# Allegro board fpga_ccd_3.brd
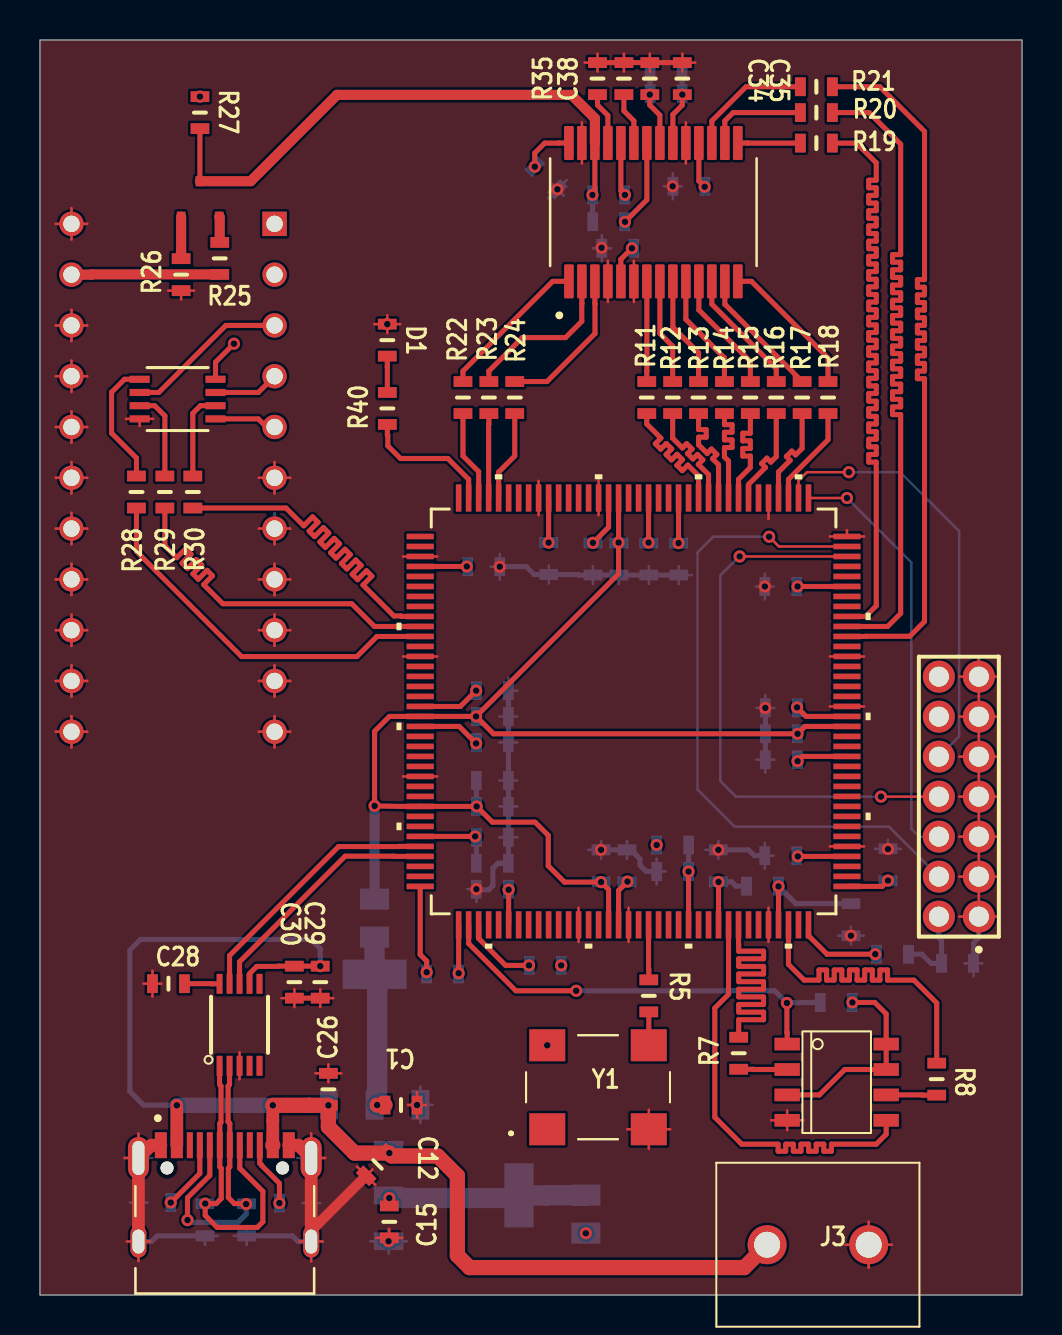
[diagram p0: board, top side]
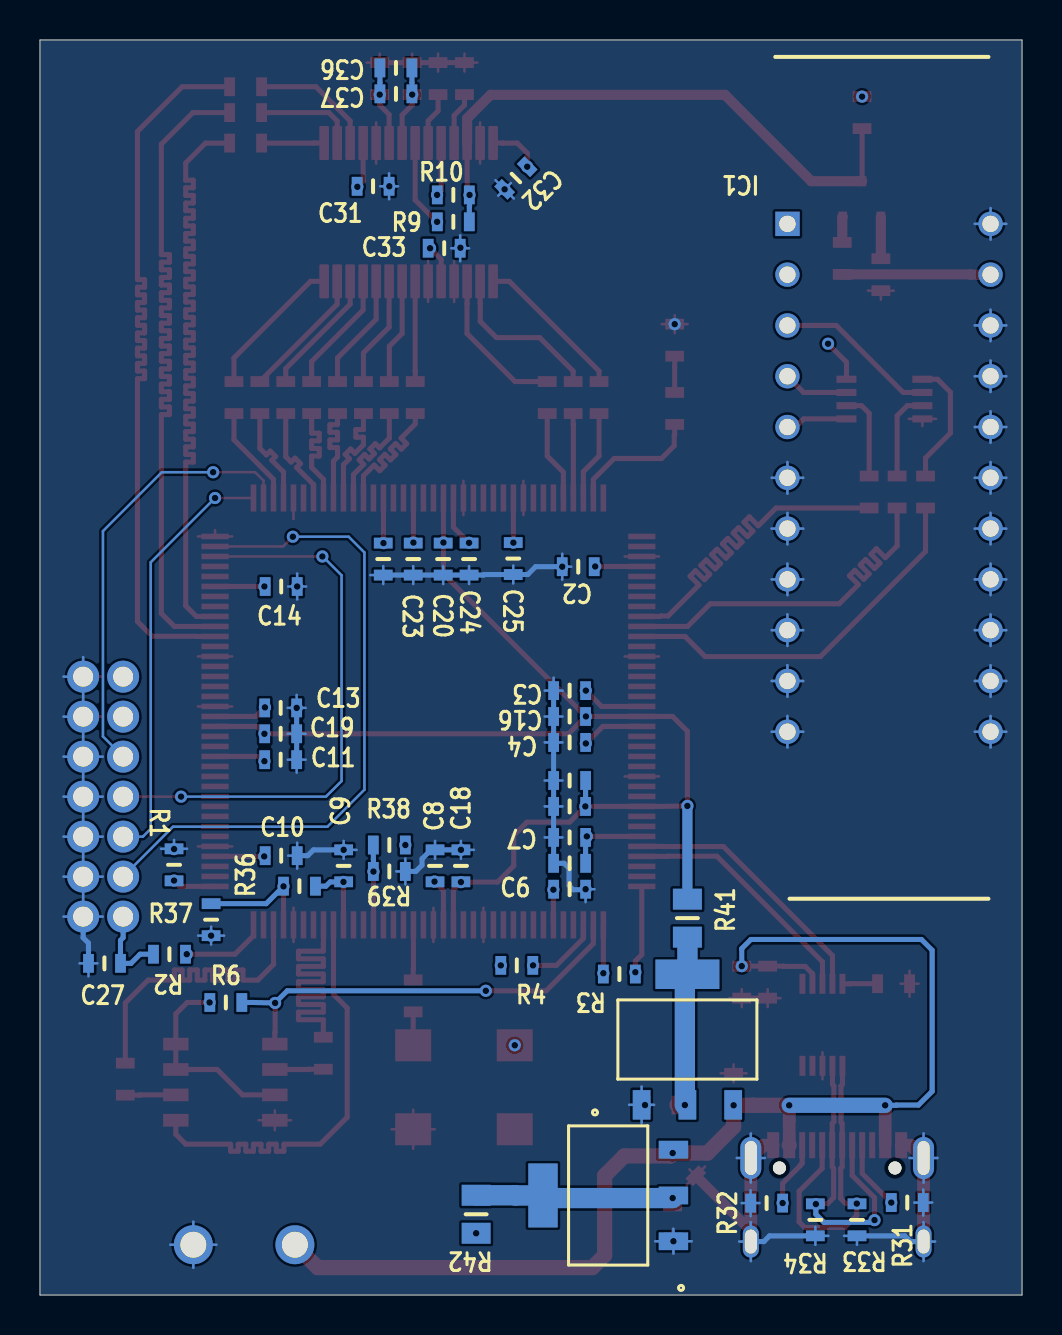
[diagram p1: board, bottom side, seen from below]

Outline 49.12 x 62.76 mm; copper layers: TOP, GND, POWER, BOTTOM. Coordinates in mm from the lower left corner of the outline.
Outline path: 0,62.76 0,0 49.12,0 49.12,62.76 0,62.76

## Design rules (mm)
constraint set DEFAULT: min track width 0.127
net group +1.2V: nets +1.2V N30787
net group CLK_50M: nets CLK_50M N10342
net group N39901: nets N39901 N39920
net group N45186: nets N45080 N45186
net group N103582: nets N103518 N103582
net group USB_D: nets USB_D+ USB_D-
net group CCD_OS: nets CCD_OS N41358 N41362

## Placement (name value [footprint] x y rotation side)
C1  10uF  [0603]  18.06 9.5 180 top
C2  10uF  [0603]  22.2 36.42 0 bottom
C3  100nF  [0603]  22.63 30.23 0 bottom
C4  100nF  [0603]  22.63 27.64 0 bottom
C5  100nF  [0603]  22.63 21.59 0 bottom
C6  100nF  [0603]  22.63 20.29 180 bottom
C7  100nF  [0603]  22.63 22.89 0 bottom
C8  100nF  [0603]  29.36 21.46 90 bottom
C9  100nF  [0603]  33.93 21.46 90 bottom
C10  100nF  [0603]  37.06 21.97 180 bottom
C11  100nF  [0603]  37.08 26.77 180 bottom
C12  10uF  [0603]  16.88 6.53 225 top
C13  100nF  [0603]  37.08 29.36 180 bottom
C14  100nF  [0603]  37.06 35.43 180 bottom
C15  10uF  [0603]  17.48 3.66 90 top
C16  10uF  [0603]  22.63 28.93 0 bottom
C17  100nF  [0603]  22.63 24.43 0 bottom
C18  100nF  [0603]  28.07 21.46 90 bottom
C19  100nF  [0603]  37.08 28.07 180 bottom
C20  100nF  [0603]  28.96 36.8 270 bottom
C21  100nF  [0603]  22.63 25.73 0 bottom
C22  100nF  [0603]  31.95 36.8 270 bottom
C23  100nF  [0603]  30.45 36.8 270 bottom
C24  100nF  [0603]  27.66 36.8 270 bottom
C25  100nF  [0603]  25.45 36.83 270 bottom
C26  10uF  [0603]  14.43 10.29 90 top
C27  100nF  [0603]  45.9 16.59 180 bottom
C28  100nF  [0603]  6.43 15.57 0 top
C29  10uF  [0603]  14.02 15.65 270 top
C30  10uF  [0603]  12.73 15.65 270 top
C31  100nF  [0603]  32.46 55.45 180 bottom
C32  100nF  [0603]  25.32 55.86 315 bottom
C33  100nF  [0603]  28.91 52.35 180 bottom
C34  100nF  [0603]  30.51 60.83 270 top
C35  100nF  [0603]  32.13 60.83 270 top
C36  100nF  [0603]  31.32 61.37 0 bottom
C37  10uF  [0603]  31.32 60.07 0 bottom
C38  100nF  [0603]  29.21 60.83 270 top
D1  LED  [0603]  17.37 47.75 270 top
IC1  TCD1304DG_8Z_AW_  [DIP1016W62P254L4160H372Q22N]  11.73 53.57 180 bottom
J1  CONN SOCKET 7x2  [CONN_BULK_HEADER_2X7_2_2]  46.96 18.92 90 top
J2  CQ-USB-C16PSMT01  [SHENZHEN-CHUANGQIN-TECHNOLO]  9.25 7.49 0 top
J3  TB006-508-02BE  [TB00650802BE]  36.37 2.51 0 top
NOREF  -  []  0 0 90 top
NOREF#2  -  []  0 0 0 top
Q1  2SA1015  [SOT23]  8 54.81 90 top
R1  4.7K  [0603]  42.42 21.51 270 bottom
R2  4.7K  [0603]  42.65 17.04 0 bottom
R3  4.7K  [0603]  20.14 16.05 0 bottom
R4  4.7K  [0603]  25.27 16.48 180 bottom
R5  33  [0603]  30.45 14.96 270 top
R6  4.7K  [0603]  39.83 14.63 180 bottom
R7  33  [0603]  34.95 12.09 90 top
R8  33  [0603]  44.86 10.79 270 top
R9  NC  [0603]  28.45 53.67 180 bottom
R10  NC  [0603]  28.45 55.02 180 bottom
R11  33R  [0603]  30.35 44.88 90 top
R12  33R  [0603]  31.65 44.88 90 top
R13  33R  [0603]  32.94 44.88 90 top
R14  33R  [0603]  34.24 44.88 90 top
R15  33R  [0603]  35.53 44.88 90 top
R16  33R  [0603]  36.83 44.88 90 top
R17  33R  [0603]  38.13 44.88 90 top
R18  33R  [0603]  39.42 44.88 90 top
R19  33R  [0603]  38.84 57.61 0 top
R20  33R  [0603]  38.84 59.13 0 top
R21  33R  [0603]  38.84 60.43 0 top
R22  33R  [0603]  21.16 44.88 90 top
R23  33R  [0603]  22.45 44.88 90 top
R24  33R  [0603]  23.75 44.88 90 top
R25  150R  [0603]  8.99 51.84 90 top
R26  150R  [0603]  7.06 51.03 90 top
R27  150R  [0603]  8 59.13 270 top
R28  33R  [0603]  4.83 40.16 90 top
R29  33R  [0603]  6.25 40.16 90 top
R30  33R  [0603]  7.65 40.16 90 top
R31  5.1K  [0603]  5.74 4.62 0 bottom
R32  5.1K  [0603]  12.78 4.6 0 bottom
R33  45R  [0603]  8.25 3.76 270 bottom
R34  45R  [0603]  10.34 3.76 270 bottom
R35  1K  [0603]  27.89 60.83 90 top
R36  0R  [0603]  36.14 20.45 180 bottom
R37  NC  [0603]  40.56 18.77 90 bottom
R38  NC  [0603]  31.65 22.5 180 bottom
R39  1K  [0603]  31.65 21.18 0 bottom
R40  1K  [0603]  17.38 44.34 90 top
R41  10R  [0805]  16.74 18.85 90 bottom
R42  10R  [0805]  27.31 4.04 270 bottom
U1  XC6SLX9-2TQG144C_A  [TQG144_XIL]  29.69 29.18 0 top
U2  AMS1117-1.2v  [SOT_AMS1117-2P5_AMS]  16.74 12.78 180 bottom
U3  AMS1117-3.3v  [SOT_AMS1117-2P5_AMS]  20.7 4.98 90 bottom
U4  M25P16-VMN6TPBA  [SOIC8]  39.85 10.64 0 top
U5  CH340E  [MSOP-10]  9.98 13.51 90 top
U6  HT82V38  [SSOP-28]  30.68 54.15 90 top
U7  TC7WH14FU  [SSOP-8]  6.88 44.81 0 top
Y1  50MHz  [SMD7050]  27.91 10.39 0 top

## Library data of the parts
C1-C38 = CAP NP
D1 = LED
IC1 = TCD1304DG_8Z,AW_
J1 = CONN SOCKET 7x2
J2 = USB-C 16pin
J3 = TB006-508-02BE
Q1 = 2N6520
R1-R5 R7 R8 R36-R39 = RESISTOR
R6 = Res 0603
R9-R35 R40-R42 = R
U1 = XC6SLX9-2TQG144C: User Part Number: PN; Tolerance: TOL
U2 U3 = AMS1117: User Part Number: PN; Tolerance: TOL
U4 = M25P16-VMN6TPBA: Tolerance: ***; User Part Number: ***
U5 = CH340E
U6 = HT82V38
U7 = TC7WH14FU: User Part Number: PN; Tolerance: TOL
Y1 = Oscillator 4p

## Footprints (pads in the part's own frame, mm; a bottom-side part is the same pattern mirrored in y, then rotated)
0603
  rect 0.54x0.94 smd: 1(-0.8,0) 2(0.8,0)
0805
  rect 1.05x1.45 smd: 1(-0.95,0) 2(0.95,0)
CONN_BULK_HEADER_2X7_2_2
  round 1.6 hole 1: 1(0,0) 2(0,2) 3(2,0) 4(2,2) 5(4,0) 6(4,2) 7(6,0) 8(6,2) 9(8,0) 10(8,2) 11(10,0) 12(10,2) 13(12,0) 14(12,2)
DIP1016W62P254L4160H372Q22N
  rect 1.22x1.22 hole 0.82: 1(0,0)
  round 1.22 hole 0.82: 2(0,-2.54) 3(0,-5.08) 4(0,-7.62) 5(0,-10.16) 6(0,-12.7) 7(0,-15.24) 8(0,-17.78) 9(0,-20.32) 10(0,-22.86) 11(0,-25.4) 12(10.16,-25.4) 13(10.16,-22.86) 14(10.16,-20.32) 15(10.16,-17.78) 16(10.16,-15.24) 17(10.16,-12.7) 18(10.16,-10.16) 19(10.16,-7.62) 20(10.16,-5.08) 21(10.16,-2.54) 22(10.16,0)
MSOP-10
  rect 1x0.3 smd: 1(-2.05,1) 2(-2.05,0.5) 3(-2.05,0) 4(-2.05,-0.5) 5(-2.05,-1) 6(2.05,-1) 7(2.05,-0.5) 8(2.05,0) 9(2.05,0.5) 10(2.05,1)
SHENZHEN-CHUANGQIN-TECHNOLO
  round 0.65 hole 0.65 unplated: (-2.89,-1.14) (2.89,-1.14)
  rect 0.6x1.3 smd: A1_B12(-3.2,0) A4_B9(-2.4,0) B1_A12(3.2,0) B4_A9(2.4,0)
  rect 0.3x1.3 smd: A5(-1.25,0) A6(-0.25,0) A7(0.25,0) A8(1.25,0) B5(1.75,0) B6(0.75,0) B7(-0.75,0) B8(-1.75,0)
  oval 1.05x2.1 hole 0.6x1.7: S1(-4.32,-0.64) S2(4.32,-0.64)
  oval 0.8x1.6 hole 0.6x1.2: S3(-4.32,-4.82) S4(4.32,-4.82)
SMD7050
  rect 1.8x1.6 smd: 1(-2.54,-2.1) 2(2.54,-2.1) 3(2.54,2.1) 4(-2.54,2.1)
SOIC8
  rect 1.27x0.635 smd: 1(-2.477,1.905) 2(-2.477,0.635) 3(-2.477,-0.635) 4(-2.477,-1.905) 5(2.477,-1.905) 6(2.477,-0.635) 7(2.477,0.635) 8(2.477,1.905)
SOT23
  rect 0.508x0.432 smd: 1(-0.889,0.94) 2(-0.889,-0.965) 3(0.889,0)
SOT_AMS1117-2P5_AMS
  rect 0.889x1.473 smd: 1(-2.29,-3.264) 2(0,-3.264) 3(2.29,-3.264)
  rect 3.2x1.473 smd: 4(0,3.264)
SSOP-8
  rect 1.003x0.356 smd: 1(-1.899,0.991) 2(-1.899,0.33) 3(-1.899,-0.33) 4(-1.899,-0.991) 5(1.899,-0.991) 6(1.899,-0.33) 7(1.899,0.33) 8(1.899,0.991)
SSOP-28
  custom 1.7x0.48 smd: 1(-3.46,4.225) 2(-3.46,3.575) 3(-3.46,2.925) 4(-3.46,2.275) 5(-3.46,1.625) 6(-3.46,0.975) 7(-3.46,0.325) 8(-3.46,-0.325) 9(-3.46,-0.975) 10(-3.46,-1.625) 11(-3.46,-2.275) 12(-3.46,-2.925) 13(-3.46,-3.575) 14(-3.46,-4.225) 15(3.46,-4.225) 16(3.46,-3.575) 17(3.46,-2.925) 18(3.46,-2.275) 19(3.46,-1.625) 20(3.46,-0.975) 21(3.46,-0.325) 22(3.46,0.325) 23(3.46,0.975) 24(3.46,1.625) 25(3.46,2.275) 26(3.46,2.925) 27(3.46,3.575) 28(3.46,4.225)
TB00650802BE
  round 1.95 hole 1.3: 1(0,0) 2(5.08,0)
TQG144_XIL
  rect 1.359x0.279 smd: 1(-10.674,8.75) 2(-10.674,8.25) 3(-10.674,7.75) 4(-10.674,7.25) 5(-10.674,6.75) 6(-10.674,6.25) 7(-10.674,5.75) 8(-10.674,5.25) 9(-10.674,4.75) 10(-10.674,4.25) 11(-10.674,3.75) 12(-10.674,3.25) 13(-10.674,2.75) 14(-10.674,2.25) 15(-10.674,1.75) 16(-10.674,1.25) 17(-10.674,0.75) 18(-10.674,0.25) 19(-10.674,-0.25) 20(-10.674,-0.75) 21(-10.674,-1.25) 22(-10.674,-1.75) 23(-10.674,-2.25) 24(-10.674,-2.75) 25(-10.674,-3.25) 26(-10.674,-3.75) 27(-10.674,-4.25) 28(-10.674,-4.75) 29(-10.674,-5.25) 30(-10.674,-5.75) 31(-10.674,-6.25) 32(-10.674,-6.75) 33(-10.674,-7.25) 34(-10.674,-7.75) 35(-10.674,-8.25) 36(-10.674,-8.75) 73(10.674,-8.75) 74(10.674,-8.25) 75(10.674,-7.75) 76(10.674,-7.25) 77(10.674,-6.75) 78(10.674,-6.25) 79(10.674,-5.75) 80(10.674,-5.25) 81(10.674,-4.75) 82(10.674,-4.25) 83(10.674,-3.75) 84(10.674,-3.25) 85(10.674,-2.75) 86(10.674,-2.25) 87(10.674,-1.75) 88(10.674,-1.25) 89(10.674,-0.75) 90(10.674,-0.25) 91(10.674,0.25) 92(10.674,0.75) 93(10.674,1.25) 94(10.674,1.75) 95(10.674,2.25) 96(10.674,2.75) 97(10.674,3.25) 98(10.674,3.75) 99(10.674,4.25) 100(10.674,4.75) 101(10.674,5.25) 102(10.674,5.75) 103(10.674,6.25) 104(10.674,6.75) 105(10.674,7.25) 106(10.674,7.75) 107(10.674,8.25) 108(10.674,8.75)
  rect 0.279x1.359 smd: 37(-8.75,-10.674) 38(-8.25,-10.674) 39(-7.75,-10.674) 40(-7.25,-10.674) 41(-6.75,-10.674) 42(-6.25,-10.674) 43(-5.75,-10.674) 44(-5.25,-10.674) 45(-4.75,-10.674) 46(-4.25,-10.674) 47(-3.75,-10.674) 48(-3.25,-10.674) 49(-2.75,-10.674) 50(-2.25,-10.674) 51(-1.75,-10.674) 52(-1.25,-10.674) 53(-0.75,-10.674) 54(-0.25,-10.674) 55(0.25,-10.674) 56(0.75,-10.674) 57(1.25,-10.674) 58(1.75,-10.674) 59(2.25,-10.674) 60(2.75,-10.674) 61(3.25,-10.674) 62(3.75,-10.674) 63(4.25,-10.674) 64(4.75,-10.674) 65(5.25,-10.674) 66(5.75,-10.674) 67(6.25,-10.674) 68(6.75,-10.674) 69(7.25,-10.674) 70(7.75,-10.674) 71(8.25,-10.674) 72(8.75,-10.674) 109(8.75,10.674) 110(8.25,10.674) 111(7.75,10.674) 112(7.25,10.674) 113(6.75,10.674) 114(6.25,10.674) 115(5.75,10.674) 116(5.25,10.674) 117(4.75,10.674) 118(4.25,10.674) 119(3.75,10.674) 120(3.25,10.674) 121(2.75,10.674) 122(2.25,10.674) 123(1.75,10.674) 124(1.25,10.674) 125(0.75,10.674) 126(0.25,10.674) 127(-0.25,10.674) 128(-0.75,10.674) 129(-1.25,10.674) 130(-1.75,10.674) 131(-2.25,10.674) 132(-2.75,10.674) 133(-3.25,10.674) 134(-3.75,10.674) 135(-4.25,10.674) 136(-4.75,10.674) 137(-5.25,10.674) 138(-5.75,10.674) 139(-6.25,10.674) 140(-6.75,10.674) 141(-7.25,10.674) 142(-7.75,10.674) 143(-8.25,10.674) 144(-8.75,10.674)

## Nets
+1.2V: C16.1 C17.1 C18.1 C19.1 C20.1 C21.1 R41.2 U1.19 U1.28 U1.52 U1.89 U1.128
+3.3V: C2.1 C3.1 C4.1 C5.1 C6.1 C7.1 C8.1 C9.1 C10.1 C11.1 C13.1 C14.1 C22.1 C23.1 C24.1 C25.1 C27.2 C31.1 C32.1 C33.1 IC1.1(\VDD\) IC1.2 J1.2 R2.2 R3.1 R4.1 R6.1 R27.1 R36.2 R38.2 R42.2 U1.4 U1.18 U1.20 U1.31 U1.36 U1.42 U1.53 U1.63 U1.76 U1.86 U1.90 U1.103(\VCCO_1_2\) U1.122 U1.125 U1.129 U1.135 U4.3(\W-\) U4.7 U4.8 U6.5 U6.18 U6.28 U7.8(\VCC\) Y1.4(\VCC\)
+5V: C12.1 C26.1 C29.1 C30.1 J2.A4_B9 J2.B4_A9(\VBUS#B4_A9\) J3.1 U2.3 U3.3 U5.7(\VCC\)
GND: C1.1 C2.2 C3.2 C4.2 C5.2 C6.2 C7.2 C8.2 C9.2 C10.2 C11.2 C12.2 C13.2 C14.2 C15.1 C16.2 C17.2 C18.2 C19.2 C20.2 C21.2 C22.2 C23.2 C24.2 C25.2 C26.2 C27.1 C28.1 C29.2 C30.2 C31.2 C32.2 C33.2 C34.1 C35.1 C38.1 D1.1(\CATHODE\) IC1.6 IC1.7 IC1.8 IC1.9 IC1.10 IC1.11 IC1.12 IC1.13 IC1.14 IC1.15 IC1.16 IC1.17 IC1.18 IC1.19 IC1.20 IC1.22 J1.1 J1.3 J1.5 J1.7 J1.9 J1.11 J1.13 J2.A1_B12 J2.B1_A12 J2.S1 J2.S2 J2.S3 J2.S4 J3.2 R1.1 R26.1 R31.1 R32.2 R33.2 R34.2 R35.2 R37.1 R39.1 U1.3 U1.13 U1.25 U1.49 U1.54 U1.68 U1.77 U1.91 U1.96 U1.108 U1.113 U1.130 U1.136 U2.1 U3.1 U4.4 U5.3 U6.4 U6.6 U6.19 U6.27 U7.4 Y1.2
ADCCLK: R24.1 U1.140
CCD_ICG: R30.1 U1.9
CCD_MASTER: R28.1 U1.11
CCD_OS: Q1.3 R9.2 R10.2 R27.2 U6.26(\VINR\)
CCD_SH: R29.1 U1.10
CDSCLK1: R22.1 U1.142
CDSCLK2: R23.1 U1.141
CLK_50M: R5.1 U1.56
HT82V38_D0: R18.1 U1.111
HT82V38_D1: R17.1 U1.112
HT82V38_D2: R16.1 U1.115
HT82V38_D3: R15.1 U1.116
HT82V38_D4: R14.1 U1.117
HT82V38_D5: R13.1 U1.118
HT82V38_D6: R12.1 U1.119
HT82V38_D7: R11.1 U1.120
M0: R36.1 R37.2 U1.69
M1: R38.1 R39.2 U1.60
SCLK: R20.2 U1.99
SDATA: R19.2 U1.100
SLOAD: R21.2 U1.98
SPI_FLASH_CLK: R8.1 U1.70
SPI_FLASH_CSO: R6.2 U1.38 U4.1
SPI_FLASH_MISO: R7.2 U1.65
SPI_FLASH_MOSI: U1.64 U4.5
TCK_F: J1.6 U1.109
TDI_F: J1.10 U1.110
TDO_F: J1.8 U1.106
TMS_F: J1.4(9) U1.107
UART_RXD: U1.33 U5.8
UART_TXD: U1.32 U5.9
USB_D+: J2.A6 J2.B6 R33.1 U5.1
USB_D-: J2.A7 J2.B7 R34.1 U5.2
N00968: R4.2 U1.39
N10342: R5.2 Y1.3
N10587: R7.1 U4.2
N10673: R8.2 U4.6
N14884: R3.2 U1.37
N15354: R1.2 U1.73
N15645: R2.1 U1.72
N29928: C28.2 U5.10
N30787: C1.2 R41.1 U2.2 U2.4(\VOUT\)
N30939: C15.2 R42.1 U3.2 U3.4(\VOUT\)
N39536: R21.1 U6.17
N39538: R20.1 U6.16
N39540: R19.1 U6.15
N39901: C35.2 C36.2 C37.2 U6.20
N39920: C34.2 C36.1 C37.1 U6.21
N40100: C38.2 U6.23
N41358: R10.1 U6.24
N41362: R9.1 U6.22
N41426: R35.1 U6.25
N42799: R13.2 U6.9
N42805: R14.2 U6.10
N42811: R12.2 U6.8
N42817: R15.2 U6.11
N42823: R18.2 U6.14
N42829: R17.2 U6.13
N42835: R16.2 U6.12
N42841: R11.2 U6.7
N43637: R22.2 U6.1
N43673: R23.2 U6.2
N43709: R24.2 U6.3
N45080: IC1.21 R25.1
N45186: Q1.2 R25.2
N45216: Q1.1(\EMITTER\) R26.2
N45901: IC1.5 U7.5
N45905: IC1.3 U7.2
N45930: R30.2 U7.6
N46162: R28.2 U7.1
N46224: R29.2 U7.3
N46412: IC1.4 U7.7
N48976: J2.B5 R32.1
N49298: J2.A5 R31.2
N103518: R40.1 U1.143
N103582: D1.2 R40.2

Pads without a net: J1 12 14; J2 A8 B8; U1 1 2 5 6 7 8 12 14 15 16 17 21 22 23 24 26 27 29 30 34 35 40 41 43 44 45 46 47 48 50 51 55 57 58 59 61 62 66 67 71 74 75 78 79 80 81 82 83 84 85 87 88 92 93 94 95 97 101 102 104 105 114 121 123 124 126 127 131 132 133 134 137 138 139 144; U5 4 5 6; Y1 1

## Via types
v1: diameter 0.61, hole 0.33, TOP to BOTTOM, 76 vias

## Routing (per net, layer and track width the routed paths; a pad name or vN(x,y) marks a point on that pad's centre or on a via; arc(x,y) is an arc through that point)
+1.2V: length 64.1
  TOP w0.254: U1.128 v1(28.94,37.63) 28.94,36.06 v1(21.81,28.93) ; U1.89 38.26,28.43 v1(37.9,28.07) 22.68,28.07 v1(21.81,28.93) ; U1.52 28.44,20.27 v1(28.07,20.65) 26.24,20.65 25.43,21.46 25.43,22.99 24.76,23.65 22.63,23.65 v1(21.84,24.43) U1.28 18.08,24.43 v1(16.74,24.46) 16.74,28.19 17.48,28.93 U1.19 v1(21.81,28.93)
  BOTTOM w0.254: C17.1 C21.1
  BOTTOM w0.508: R41.2 v1(16.74,24.46)
+3.3V: length 78.1
  TOP w0.127: v1(27.31,3.09) 27.39,3.09 ; v1(19.34,16.14) 19.34,16.12
  TOP w0.254: v1(37.9,26.7) 38.14,26.93 U1.86 ; U1.129 28.44,38.4 v1(27.66,37.62) ; U7.8 8.78,46.65 v1(9.7,47.57) ; v1(29.61,52.35) 29.06,51.8 U6.5 ; v1(21.82,30.23) 21.03,29.43 U1.18 ; U1.76 v1(37.91,21.93) ; v1(21.82,27.58) 20.97,28.43 U1.20 ; U1.135 v1(25.44,37.63) ; U1.103 v1(37.9,35.43) ; U1.125 v1(30.44,37.63) ; v1(37.87,29.39) 38.32,28.93 U1.90 ; v1(29.39,20.68) 28.94,20.23 U1.53 ; U6.28 25.96,57.61 25.96,57.61 25.25,57.61 24.75,57.11 v1(24.75,56.43) ; U1.4 v1(21.35,36.43) ; v1(19.34,16.14) 19.34,16.7 19.02,17.02 U1.36 ; v1(40.64,14.63) 41.76,14.63 42.33,14.06 U4.8 U4.7 40.26,11.28 38.99,10.01 U4.3 ; U1.31 v1(21.77,22.93) ; U1.122 v1(31.94,37.6) ; U1.42 v1(23.44,20.27) ; U6.18 32.96,55.71 v1(33.25,55.42) ; U1.63 v1(33.94,20.66)
  POWER w0.127: 10.95,51.03 11.73,51.03 ; 11.73,51.03 12.52,51.03 ; 11.73,51.03 11.73,50.24 ; 11.73,51.03 11.73,51.82 ; 10.95,53.57 IC1.1 ; IC1.1 12.52,53.57 ; IC1.1 11.73,54.36 ; IC1.1 11.73,52.78 ; J1.2 45.94,18.92 ; J1.2 43.99,18.92 ; J1.2 44.96,19.9 ; J1.2 44.96,17.94
  BOTTOM w0.127: R3.1 v1(19.34,16.14) ; v1(25.37,12.49) 25.39,12.49 ; v1(8,59.93) 8,59.94
  BOTTOM w0.254: J1.2 44.96,17.87 45.1,17.74 C27.2 44.57,16.59 44.12,17.04 R2.2 ; R36.2 34.82,20.45 34.61,20.66 v1(33.94,20.66) ; C7.1 C5.1
  vias: v1(26.07,16.48) v1(30.85,22.5)
+5V: length 65.1
  TOP w0.254: v1(14.02,16.45) C30.1 11.93,16.45 11.91,16.43 10.84,16.43 10.48,16.07 U5.7
  TOP w0.635: J2.B4_A9 11.65,8.74 v1(11.65,9.49) ; J2.A4_B9 v1(6.85,9.49)
  TOP w0.762: v1(17.48,7.1) 15.74,7.1 14.43,8.41 v1(14.43,9.49) 13.45,9.49 v1(11.65,9.49) ; J3.1 35.23,1.37 21.49,1.37 20.88,1.98 20.88,5.97 19.89,6.95 17.59,6.95 C12.1
  BOTTOM w0.254: v1(14.02,16.45) 14.02,17.32 13.56,17.78 5.03,17.78 4.5,17.25 4.5,10.19 5.18,9.5 6.27,9.5 6.29,9.49 v1(6.85,9.49)
  BOTTOM w0.762: v1(6.85,9.49) v1(11.65,9.49)
GND: length 452.6
  TOP w0.127: 0.79,33.25 1.57,33.25 ; 1.57,33.25 1.57,34.04 ; 1.57,33.25 2.36,33.25 ; 1.57,33.25 1.57,32.46 ; v1(18.86,9.5) 19.31,9.5 ; v1(18.86,9.5) 18.86,8.85 ; v1(18.86,9.5) 18.86,10.15 ; v1(18.86,9.5) 18.41,9.5 ; J1.5 46.96,23.9 ; J1.5 47.94,22.92 ; J1.5 46.96,21.94 ; J1.5 45.99,22.92 ; 19.88,31.93 U1.13 18.16,31.93 ; J1.7 47.94,24.92 ; J1.7 45.99,24.92 ; J1.7 46.96,23.94 ; J1.7 46.96,25.9 ; 32.31,58.64 U6.19 32.31,56.58 ; 45.99,18.92 J1.1 ; J1.1 46.96,17.94 ; J1.1 47.94,18.92 ; J1.1 46.96,19.9 ; 19.88,36.93 U1.3 18.16,36.93 ; IC1.19 1.57,46.74 ; IC1.19 1.57,45.16 ; IC1.19 0.79,45.95 ; IC1.19 2.36,45.95 ; 40.3,2.51 J3.2 ; J3.2 41.45,1.36 ; J3.2 41.45,3.67 ; J3.2 42.61,2.51 ; 29.71,49.66 U6.6 29.71,51.72 ; 46.96,25.94 J1.9 ; J1.9 46.96,27.9 ; J1.9 47.94,26.92 ; J1.9 45.99,26.92 ; IC1.11 11.73,28.96 ; IC1.11 10.95,28.17 ; IC1.11 12.52,28.17 ; IC1.11 11.73,27.38 ; 1.57,43.41 1.57,44.2 ; 1.57,43.41 1.57,42.62 ; 1.57,43.41 0.79,43.41 ; 1.57,43.41 2.36,43.41 ; 11.73,33.25 11.73,34.04 ; 11.73,33.25 12.52,33.25 ; 11.73,33.25 11.73,32.46 ; 11.73,33.25 10.95,33.25 ; 11.73,40.87 12.52,40.87 ; 11.73,40.87 11.73,40.08 ; 11.73,40.87 10.95,40.87 ; 11.73,40.87 11.73,41.66 ; IC1.12 2.36,28.17 ; IC1.12 1.57,27.38 ; IC1.12 1.57,28.96 ; IC1.12 0.79,28.17 ; C35.1 32.13,62.08 ; C35.1 32.13,61.18 ; C35.1 32.78,61.63 ; 4.98,43.46 U7.4 ; U7.4 5.66,43.81 ; U7.4 4.3,43.81 ; C28.1 6.07,15.57 ; C28.1 5.18,15.57 ; C28.1 5.63,16.22 ; C28.1 5.63,14.92 ; v1(17.37,48.55) 18.02,48.55 ; v1(17.37,48.55) 17.37,48.1 ; v1(17.37,48.55) 16.73,48.55 ; v1(17.37,48.55) 17.37,49 ; 39.51,37.93 U1.108 ; U1.108 40.37,38.25 ; U1.108 41.22,37.93 ; 9.98,12.14 U5.3 9.98,10.78 ; 11.73,37.54 IC1.7 ; IC1.7 12.52,38.33 ; IC1.7 10.95,38.33 ; J1.13 47.94,30.92 ; J1.13 46.96,31.9 ; J1.13 45.99,30.92 ; J1.13 46.96,29.94 ; 1.57,37.54 IC1.16 ; IC1.16 0.79,38.33 ; IC1.16 1.57,39.12 ; IC1.16 2.36,38.33 ; 26.94,19.37 U1.49 26.94,17.65 ; 11.73,29.92 11.73,30.71 ; 11.73,30.71 11.73,31.5 ; 11.73,30.71 12.52,30.71 ; 11.73,30.71 10.95,30.71 ; C15.1 17.48,3.31 ; C15.1 18.12,2.86 ; C15.1 16.83,2.86 ; 39.51,29.43 U1.91 41.22,29.43 ; 41.22,31.93 U1.96 39.51,31.93 ; 27.24,61.63 R35.2 ; R35.2 27.89,62.08 ; R35.2 27.89,61.18 ; 14.43,10.64 C26.2 ; C26.2 15.08,11.09 ; C26.2 13.78,11.09 ; C26.2 14.43,11.54 ; 27.94,39 U1.130 27.94,40.72 ; J1.3 47.94,20.92 ; J1.3 46.96,19.94 ; J1.3 46.96,21.9 ; J1.3 45.99,20.92 ; 0.79,53.57 IC1.22 ; IC1.22 1.57,52.78 ; IC1.22 2.36,53.57 ; IC1.22 1.57,54.36 ; 46.96,27.94 J1.11 ; J1.11 46.96,29.9 ; J1.11 47.94,28.92 ; J1.11 45.99,28.92 ; J2.S3 5.5,2.67 ; J2.S3 4.35,2.67 ; J2.S3 4.93,1.69 ; 29.44,17.65 U1.54 29.44,19.37 ; 13.57,1.69 J2.S4 ; J2.S4 12.99,2.67 ; J2.S4 14.14,2.67 ; 24.94,39 U1.136 24.94,40.72 ; U4.4 37.38,9.23 ; U4.4 38.19,8.74 ; U4.4 37.38,8.24 ; U4.4 36.56,8.74 ; 4.93,8.08 J2.S1 4.22,6.85 ; 28.41,51.72 U6.4 28.41,49.66 ; 0.79,40.87 1.57,40.87 ; 1.57,40.87 1.57,40.08 ; 1.57,40.87 1.57,41.66 ; 1.57,40.87 2.36,40.87 ; C12.2 16.63,6.28 ; C12.2 16.78,5.51 ; C12.2 15.86,6.42 ; IC1.15 1.57,36.58 ; IC1.15 0.79,35.79 ; IC1.15 1.57,35 ; IC1.15 2.36,35.79 ; U1.113 36.44,38.82 36.45,38.81 ; 36.44,19.37 U1.68 36.44,17.65 ; 1.57,47.7 IC1.20 ; IC1.20 0.79,48.49 ; IC1.20 1.57,49.28 ; IC1.20 2.36,48.49 ; 30.51,61.18 C34.1 30.51,62.08 ; 29.38,8.29 Y1.2 ; Y1.2 30.45,9.27 ; Y1.2 31.53,8.29 ; Y1.2 30.45,7.31 ; 0.79,30.71 1.57,30.71 ; 1.57,30.71 1.57,29.92 ; 1.57,30.71 1.57,31.5 ; 1.57,30.71 2.36,30.71 ; C29.2 14.02,15.29 ; C29.2 14.02,14.4 ; C29.2 14.67,14.85 ; 6.41,50.23 R26.1 ; R26.1 7.06,49.78 ; R26.1 7.71,50.23 ; 13.57,8.08 J2.S2 14.27,6.85 ; 41.22,22.43 U1.77 39.51,22.43 ; C30.2 12.73,15.29 ; C30.2 12.08,14.85 ; C30.2 12.73,14.4 ; 29.21,61.18 C38.1 29.21,62.08 ; IC1.8 12.52,35.79 ; IC1.8 10.95,35.79 ; IC1.8 11.73,35 ; IC1.8 11.73,36.58 ; 19.88,25.93 U1.25 18.16,25.93 ; 27.11,58.64 U6.27 27.11,56.58
  TOP w0.254: C35.1 C34.1 C38.1 R35.2 ; C29.2 C30.2
  TOP w0.508: 13.57,3.21 C12.2
  TOP w0.635: J2.B1_A12 12.93,7.49 J2.S2 J2.S4 ; J2.A1_B12 5.57,7.49 J2.S1 J2.S3
  GND w0.127: J1.5 46.96,23.9 ; J1.5 47.94,22.92 ; J1.5 46.96,21.94 ; J1.5 45.99,22.92 ; 11.73,40.87 11.73,41.66 ; 11.73,40.87 12.52,40.87 ; 11.73,40.87 11.73,40.08 ; 11.73,40.87 10.95,40.87 ; 0.79,40.87 1.57,40.87 ; 1.57,40.87 1.57,41.66 ; 1.57,40.87 2.36,40.87 ; 1.57,40.87 1.57,40.08 ; IC1.12 1.57,28.96 ; IC1.12 2.36,28.17 ; IC1.12 0.79,28.17 ; IC1.12 1.57,27.38 ; 0.79,33.25 1.57,33.25 ; 1.57,33.25 1.57,32.46 ; 1.57,33.25 2.36,33.25 ; 1.57,33.25 1.57,34.04 ; 4.22,6.85 J2.S1 ; J2.S1 5.63,6.85 ; J2.S1 4.93,8.08 ; J2.S1 4.93,5.62 ; IC1.16 2.36,38.33 ; IC1.16 1.57,37.54 ; IC1.16 0.79,38.33 ; IC1.16 1.57,39.12 ; IC1.20 2.36,48.49 ; IC1.20 0.79,48.49 ; IC1.20 1.57,49.28 ; IC1.20 1.57,47.7 ; IC1.8 11.73,36.58 ; IC1.8 12.52,35.79 ; IC1.8 11.73,35 ; IC1.8 10.95,35.79 ; 12.99,2.67 J2.S4 ; J2.S4 14.14,2.67 ; J2.S4 13.57,1.69 ; J2.S4 13.57,3.65 ; J1.9 47.94,26.92 ; J1.9 45.99,26.92 ; J1.9 46.96,27.9 ; J1.9 46.96,25.94 ; 1.57,45.16 IC1.19 ; IC1.19 2.36,45.95 ; IC1.19 1.57,46.74 ; IC1.19 0.79,45.95 ; J2.S3 5.5,2.67 ; J2.S3 4.35,2.67 ; J2.S3 4.93,3.65 ; J2.S3 4.93,1.69 ; 1.57,42.62 1.57,43.41 ; 1.57,43.41 2.36,43.41 ; 1.57,43.41 1.57,44.2 ; 1.57,43.41 0.79,43.41 ; 46.96,23.94 J1.7 ; J1.7 47.94,24.92 ; J1.7 45.99,24.92 ; J1.7 46.96,25.9 ; IC1.22 2.36,53.57 ; IC1.22 1.57,52.78 ; IC1.22 0.79,53.57 ; IC1.22 1.57,54.36 ; 11.73,33.25 12.52,33.25 ; 11.73,33.25 10.95,33.25 ; 11.73,33.25 11.73,34.04 ; 11.73,33.25 11.73,32.46 ; 45.99,20.92 J1.3 ; J1.3 46.96,21.9 ; J1.3 47.94,20.92 ; J1.3 46.96,19.94 ; J1.11 46.96,29.9 ; J1.11 45.99,28.92 ; J1.11 46.96,27.94 ; J1.11 47.94,28.92 ; IC1.7 11.73,39.12 ; IC1.7 12.52,38.33 ; IC1.7 10.95,38.33 ; IC1.7 11.73,37.54 ; J3.2 42.61,2.51 ; J3.2 41.45,1.36 ; J3.2 40.3,2.51 ; J3.2 41.45,3.67 ; 45.99,18.92 J1.1 ; J1.1 46.96,19.9 ; J1.1 46.96,17.94 ; J1.1 47.94,18.92 ; IC1.11 12.52,28.17 ; IC1.11 10.95,28.17 ; IC1.11 11.73,28.96 ; IC1.11 11.73,27.38 ; IC1.15 2.36,35.79 ; IC1.15 1.57,35 ; IC1.15 1.57,36.58 ; IC1.15 0.79,35.79 ; 10.95,30.71 11.73,30.71 ; 11.73,30.71 11.73,31.5 ; 11.73,30.71 12.52,30.71 ; 11.73,30.71 11.73,29.92 ; 1.57,30.71 2.36,30.71 ; 1.57,30.71 1.57,31.5 ; 1.57,30.71 1.57,29.92 ; 1.57,30.71 0.79,30.71 ; J2.S2 14.27,6.85 ; J2.S2 13.57,5.62 ; J2.S2 12.86,6.85 ; J2.S2 13.57,8.08 ; J1.13 46.96,31.9 ; J1.13 46.96,29.94 ; J1.13 47.94,30.92 ; J1.13 45.99,30.92
  BOTTOM w0.127: 22.98,30.23 C3.2 ; C3.2 23.88,30.23 ; C3.2 23.43,30.87 ; 33.29,22.26 v1(33.93,22.26) ; v1(33.93,22.26) 33.93,21.81 ; v1(33.93,22.26) 33.93,22.71 ; 30.45,35.56 C23.2 30.45,36.45 ; 10.95,35.79 IC1.8 ; IC1.8 11.73,36.58 ; IC1.8 12.52,35.79 ; IC1.8 11.73,35 ; v1(17.44,2.69) 17.44,3.31 ; v1(17.44,2.69) 16.52,2.69 ; v1(17.44,2.69) 17.44,2.07 ; v1(17.44,2.69) 18.35,2.69 ; 1.57,33.25 2.36,33.25 ; 1.57,33.25 0.79,33.25 ; 1.57,33.25 1.57,32.46 ; 1.57,33.25 1.57,34.04 ; 35.81,35.43 v1(36.26,35.43) ; v1(36.26,35.43) 36.26,34.78 ; v1(36.26,35.43) 36.26,36.08 ; v1(36.26,35.43) 36.71,35.43 ; R1.1 42.42,22.76 ; R1.1 43.07,22.31 ; R1.1 41.77,22.31 ; 45.99,18.92 J1.1 ; J1.1 47.94,18.92 ; J1.1 46.96,19.9 ; 0.79,45.95 IC1.19 ; IC1.19 1.57,46.74 ; IC1.19 2.36,45.95 ; IC1.19 1.57,45.16 ; 1.57,40.87 2.36,40.87 ; 1.57,40.87 0.79,40.87 ; 1.57,40.87 1.57,40.08 ; 1.57,40.87 1.57,41.66 ; R32.2 14.02,4.6 ; R32.2 13.13,4.6 ; R32.2 13.58,3.95 ; R32.2 13.58,5.25 ; 23.88,22.89 C7.2 22.98,22.89 ; 35.84,28.07 C19.2 36.73,28.07 ; J3.2 42.61,2.51 ; J3.2 41.45,3.67 ; J3.2 41.45,1.36 ; J3.2 40.3,2.51 ; 8.9,2.96 R33.2 8.25,2.51 ; 36.28,26.12 C11.2 ; C11.2 35.84,26.77 ; C11.2 36.73,26.77 ; 11.73,40.87 11.73,41.66 ; 11.73,40.87 11.73,40.08 ; 11.73,40.87 10.95,40.87 ; 11.73,40.87 12.52,40.87 ; 45.99,20.92 J1.3 ; J1.3 47.94,20.92 ; J1.3 46.96,21.9 ; J1.3 46.96,19.94 ; 46.96,25.94 J1.9 ; J1.9 45.99,26.92 ; J1.9 46.96,27.9 ; J1.9 47.94,26.92 ; 27.66,52.35 C33.2 ; C33.2 28.11,51.7 ; C33.2 28.55,52.35 ; C33.2 28.11,53 ; J2.S3 4.93,3.65 ; J2.S3 4.93,1.69 ; J2.S3 4.35,2.67 ; C27.1 47.15,16.59 ; C27.1 46.25,16.59 ; C27.1 46.7,15.94 ; 23.88,24.43 C17.2 22.98,24.43 ; IC1.15 2.36,35.79 ; IC1.15 0.79,35.79 ; IC1.15 1.57,36.58 ; IC1.15 1.57,35 ; v1(28.07,22.26) 28.07,22.71 ; v1(28.07,22.26) 28.07,21.81 ; v1(28.07,22.26) 27.42,22.26 ; 18.41,9.51 U2.1 ; U2.1 19.65,9.51 ; U2.1 19.03,10.43 ; U2.1 19.03,8.6 ; 10.95,30.71 11.73,30.71 ; 11.73,30.71 12.52,30.71 ; 11.73,30.71 11.73,31.5 ; 11.73,30.71 11.73,29.92 ; 31.21,55.45 C31.2 ; C31.2 32.11,55.45 ; C31.2 31.66,54.8 ; C31.2 31.66,56.1 ; J2.S1 5.63,6.85 ; J2.S1 4.93,8.08 ; J2.S1 4.22,6.85 ; J2.S1 4.93,5.62 ; 0.79,28.17 IC1.12 ; IC1.12 2.36,28.17 ; IC1.12 1.57,28.96 ; IC1.12 1.57,27.38 ; 10.95,33.25 11.73,33.25 ; 11.73,33.25 11.73,32.46 ; 11.73,33.25 11.73,34.04 ; 11.73,33.25 12.52,33.25 ; v1(40.56,17.97) 40.56,18.42 ; v1(40.56,17.97) 39.92,17.97 ; v1(40.56,17.97) 40.56,17.52 ; v1(40.56,17.97) 41.21,17.97 ; v1(21.83,20.29) 22.28,20.29 ; v1(21.83,20.29) 21.38,20.29 ; v1(21.83,20.29) 21.83,19.65 ; 30.85,20.54 R39.1 ; R39.1 30.85,21.83 ; R39.1 31.3,21.18 ; 1.57,29.92 1.57,30.71 ; 1.57,30.71 2.36,30.71 ; 1.57,30.71 1.57,31.5 ; 1.57,30.71 0.79,30.71 ; J1.13 47.94,30.92 ; J1.13 46.96,31.9 ; J1.13 46.96,29.94 ; 10.95,38.33 IC1.7 ; IC1.7 11.73,37.54 ; IC1.7 12.52,38.33 ; IC1.7 11.73,39.12 ; 22.55,36.42 v1(23,36.42) ; v1(23,36.42) 23,35.78 ; v1(23,36.42) 23,37.07 ; J1.11 46.96,29.9 ; J1.11 46.96,27.94 ; J1.11 47.94,28.92 ; 0.79,38.33 IC1.16 ; IC1.16 2.36,38.33 ; IC1.16 1.57,39.12 ; IC1.16 1.57,37.54 ; 46.96,23.94 J1.7 ; J1.7 46.96,25.9 ; J1.7 45.99,24.92 ; J1.7 47.94,24.92 ; 27.66,36.45 C24.2 27.66,35.56 ; 10.34,2.51 R34.2 ; R34.2 9.69,2.96 ; R34.2 10.34,3.41 ; 25.45,36.48 C25.2 25.45,35.58 ; 1.57,47.7 IC1.20 ; IC1.20 2.36,48.49 ; IC1.20 1.57,49.28 ; IC1.20 0.79,48.49 ; 0.79,43.41 1.57,43.41 ; 1.57,43.41 2.36,43.41 ; 1.57,43.41 1.57,42.62 ; 1.57,43.41 1.57,44.2 ; J2.S4 14.14,2.67 ; J2.S4 13.57,1.69 ; J2.S4 13.57,3.65 ; 28.96,36.45 C20.2 28.96,35.56 ; 46.96,21.94 J1.5 ; J1.5 45.99,22.92 ; J1.5 46.96,23.9 ; J1.5 47.94,22.92 ; 35.84,29.36 v1(36.28,29.36) ; v1(36.28,29.36) 36.28,30.01 ; v1(36.28,29.36) 36.73,29.36 ; 4.49,4.62 R31.1 ; R31.1 5.39,4.62 ; R31.1 4.94,3.97 ; R31.1 4.94,5.27 ; IC1.11 11.73,28.96 ; IC1.11 12.52,28.17 ; IC1.11 10.95,28.17 ; IC1.11 11.73,27.38 ; J2.S2 14.27,6.85 ; J2.S2 13.57,8.08 ; J2.S2 13.57,5.62 ; J2.S2 12.86,6.85 ; 0.79,53.57 IC1.22 ; IC1.22 1.57,52.78 ; IC1.22 2.36,53.57 ; IC1.22 1.57,54.36 ; 29.36,22.71 C8.2 29.36,21.81 ; 23.88,25.73 C21.2 22.98,25.73 ; 31.95,35.56 C22.2 ; C22.2 32.6,36 ; C22.2 31.95,36.45 ; C10.2 36.71,21.97 ; C10.2 36.26,22.62 ; C10.2 36.26,21.32 ; 25.42,54.84 v1(25.88,55.3) ; v1(25.88,55.3) 25.57,55.61 ; v1(25.88,55.3) 26.2,54.98 ; v1(25.88,55.3) 26.34,55.75 ; 22.98,28.93 C16.2 23.88,28.93 ; 23.88,27.64 C4.2 22.98,27.64
  BOTTOM w0.254: R34.2 12.63,2.96 12.91,2.67 J2.S4 ; v1(36.28,29.36) C19.2 C11.2 ; v1(21.83,20.29) 21.86,20.27 22.45,20.27 22.66,20.47 22.66,21.34 22.91,21.59 C5.2 C7.2 C17.2 C21.2 C4.2 C16.2 C3.2 ; R39.1 30.32,21.18 30.01,21.5 30.01,21.81 29.56,22.26 C8.2 v1(28.07,22.26) ; C10.2 35.73,21.97 35.44,22.26 v1(33.93,22.26) ; J1.1 46.96,17.87 46.7,17.6 C27.1 ; J2.S3 5.58,2.67 5.87,2.96 R33.2 ; v1(23,36.42) 24.33,36.42 24.73,36.03 C25.2 26.91,36.03 26.94,36 C24.2 C20.2 C23.2 C22.2 ; v1(42.42,22.3) R1.1
  vias: v1(28.09,52.37) v1(31.65,55.45)
ADCCLK: length 4.6
  TOP w0.254: U1.140 22.94,41.15 23.75,41.96 R24.1
CCD_ICG: length 21.2
  TOP w0.254: R30.1 12.31,39.36 13.19,38.47 13.64,38.91 13.91,38.64 13.46,38.2 13.73,37.93 14.18,38.38 14.45,38.11 14,37.66 14.27,37.39 14.72,37.84 14.99,37.57 14.54,37.12 14.81,36.85 15.26,37.3 15.52,37.03 15.08,36.58 15.35,36.31 15.79,36.76 16.06,36.49 15.62,36.04 15.89,35.77 16.33,36.22 16.6,35.95 16.16,35.51 17.7,33.96 18.06,33.96 18.08,33.93 U1.9
CCD_MASTER: length 19
  TOP w0.254: R28.1 4.83,37.19 10.08,31.93 15.85,31.93 16.86,32.93 U1.11
CCD_OS: length 29.9
  TOP w0.254: U6.26 27.76,55.14 v1(27.64,55.02) ; R27.2 Q1.3
  TOP w0.508: U6.26 27.76,58.84 26.58,60.02 14.86,60.02 10.54,55.7 Q1.3
  BOTTOM w0.254: v1(27.64,55.02) 27.64,54.46 27.65,54.44 R9.2
CCD_SH: length 20.1
  TOP w0.254: U1.10 16.73,33.43 15.6,34.57 9.14,34.57 8.19,35.53 8.63,35.97 8.36,36.24 7.92,35.8 7.65,36.07 8.09,36.51 7.82,36.78 7.38,36.34 7.11,36.6 7.55,37.05 7.28,37.32 6.84,36.87 6.25,37.47 R29.1
CDSCLK1: length 4.5
  TOP w0.254: U1.142 21.94,41.18 21.16,41.96 R22.1
CDSCLK2: length 4.2
  TOP w0.254: U1.141 22.44,43.55 22.45,43.56 R23.1
CLK_50M: length 2.8
  TOP w0.254: R5.1 30.45,16.28 30.44,16.3 U1.56
HT82V38_D0: length 5
  TOP w0.254: U1.111 37.44,40.79 39.42,42.77 R18.1
HT82V38_D1: length 5.3
  TOP w0.254: R17.1 38.13,42.34 37.8,42.01 37.61,42.2 37.34,41.93 37.53,41.74 36.94,41.16 U1.112
HT82V38_D2: length 5.4
  TOP w0.254: R16.1 36.83,41.92 36.56,41.65 36.36,41.85 36.09,41.58 36.29,41.39 35.44,40.54 U1.115
HT82V38_D3: length 6
  TOP w0.254: R15.1 35.53,43.1 35.15,43.1 35.15,42.72 35.53,42.72 35.53,42.34 35.15,42.34 35.15,41.96 35.53,41.96 35.53,41.38 34.94,40.79 U1.116
HT82V38_D4: length 5.8
  TOP w0.254: U1.117 34.44,41.71 34.24,41.91 34.24,42.38 34.62,42.38 34.62,42.76 34.24,42.76 34.24,43.15 34.62,43.15 34.62,43.53 34.24,43.53 R14.1
HT82V38_D5: length 6
  TOP w0.254: U1.118 33.94,41.52 33.64,41.82 33.86,42.04 33.59,42.31 33.37,42.09 32.94,42.52 32.94,42.9 33.32,42.9 33.32,43.28 32.94,43.28 R13.1
HT82V38_D6: length 6.2
  TOP w0.254: R12.1 31.65,42.85 32.14,42.36 32.35,42.58 32.62,42.31 32.39,42.08 32.66,41.81 32.89,42.04 33.16,41.77 32.93,41.54 33.44,41.03 U1.119
HT82V38_D7: length 7.7
  TOP w0.254: R11.1 30.35,43.56 31.06,42.85 30.78,42.57 31.05,42.3 31.33,42.58 31.6,42.31 31.32,42.03 31.59,41.76 31.87,42.04 32.14,41.77 31.86,41.5 32.13,41.23 32.41,41.5 32.94,40.97 U1.120
M0: length 5.9
  TOP w0.254: U1.69 v1(36.94,20.44)
  BOTTOM w0.254: R37.2 37.81,19.57 v1(36.94,20.44)
M1: length 4
  TOP w0.254: U1.60 v1(32.44,21.18)
  BOTTOM w0.254: v1(32.44,21.18) 32.44,21.77 32.45,21.78 R38.1
SCLK: length 39.4
  TOP w0.254: R20.2 41.47,59.13 43.05,57.55 43.05,52.03 42.65,52.03 42.65,51.65 43.05,51.65 43.05,51.27 42.65,51.27 42.65,50.89 43.05,50.89 43.05,50.51 42.65,50.51 42.65,50.13 43.05,50.13 43.05,49.75 42.65,49.75 42.65,49.37 43.05,49.37 43.05,48.98 42.65,48.98 42.65,48.6 43.05,48.6 43.05,48.22 42.65,48.22 42.65,47.84 43.05,47.84 43.05,47.46 42.65,47.46 42.65,47.08 43.05,47.08 43.05,46.7 42.65,46.7 42.65,46.32 43.05,46.32 43.05,45.94 42.65,45.94 42.65,45.56 43.05,45.56 43.05,45.17 42.65,45.17 42.65,44.79 43.05,44.79 43.05,44.41 42.65,44.41 42.65,44.03 43.05,44.03 43.05,34.09 42.4,33.43 U1.99
SDATA: length 40.9
  TOP w0.254: U1.100 41.3,33.93 41.83,34.47 41.83,41.66 41.45,41.66 41.45,42.04 41.83,42.04 41.83,42.42 41.45,42.42 41.45,42.8 41.83,42.8 41.83,43.18 41.45,43.18 41.45,43.56 41.83,43.56 41.83,43.94 41.45,43.94 41.45,44.32 41.83,44.32 41.83,44.7 41.45,44.7 41.45,45.08 41.83,45.08 41.83,45.47 41.45,45.47 41.45,45.85 41.83,45.85 41.83,46.23 41.45,46.23 41.45,46.61 41.83,46.61 41.83,46.99 41.45,46.99 41.45,47.37 41.83,47.37 41.83,47.75 41.45,47.75 41.45,48.13 41.83,48.13 41.83,48.51 41.45,48.51 41.45,48.89 41.83,48.89 41.83,49.28 41.45,49.28 41.45,49.66 41.83,49.66 41.83,50.04 41.45,50.04 41.45,50.42 41.83,50.42 41.83,50.8 41.45,50.8 41.45,51.18 41.83,51.18 41.83,51.56 41.45,51.56 41.45,51.94 41.83,51.94 41.83,52.32 41.45,52.32 41.45,52.7 41.83,52.7 41.83,53.09 41.45,53.09 41.45,53.47 41.83,53.47 41.83,53.85 41.45,53.85 41.45,54.23 41.83,54.23 41.83,54.61 41.45,54.61 41.45,54.99 41.83,54.99 41.83,55.37 41.45,55.37 41.45,55.75 41.83,55.75 41.83,56.62 40.84,57.61 R19.2
SLOAD: length 39.2
  TOP w0.254: U1.98 41.3,32.93 41.31,32.94 43.51,32.94 44.25,33.68 44.25,45.83 43.89,45.83 43.89,46.21 44.25,46.21 44.25,46.59 43.89,46.59 43.89,46.97 44.25,46.97 44.25,47.35 43.89,47.35 43.89,47.73 44.25,47.73 44.25,48.11 43.89,48.11 43.89,48.49 44.25,48.49 44.25,48.88 43.89,48.88 43.89,49.26 44.25,49.26 44.25,49.64 43.89,49.64 43.89,50.02 44.25,50.02 44.25,50.4 43.89,50.4 43.89,50.78 44.25,50.78 44.25,58.19 42.01,60.43 R21.2
SPI_FLASH_CLK: length 18.3
  TOP w0.254: U1.70 37.44,17.58 37.44,17.57 37.44,16.54 38.23,15.75 38.97,15.75 38.97,16.26 39.35,16.26 39.35,15.75 39.73,15.75 39.73,16.26 40.11,16.26 40.11,15.75 40.49,15.75 40.49,16.26 40.87,16.26 40.87,15.75 41.25,15.75 41.25,16.26 41.63,16.26 41.63,15.75 42.02,15.75 42.02,16.26 42.4,16.26 42.4,15.75 43.71,15.75 44.86,14.6 R8.1
SPI_FLASH_CSO: length 21.8
  TOP w0.254: v1(26.82,15.21) 23.8,15.21 21.44,17.58 U1.38 ; v1(37.36,14.6) 37.36,13.13 37.38,13.12 U4.1
  BOTTOM w0.254: R6.2 38.5,14.63 v1(37.36,14.6) 36.75,15.21 v1(26.82,15.21)
SPI_FLASH_MISO: length 18.1
  TOP w0.254: U1.65 34.94,17.58 34.95,17.57 34.95,17.2 36.19,17.2 36.19,16.81 34.95,16.81 34.95,16.43 36.19,16.43 36.19,16.05 34.95,16.05 34.95,15.67 36.19,15.67 36.19,15.29 34.95,15.29 34.95,14.91 36.19,14.91 36.19,14.53 34.95,14.53 34.95,14.15 36.19,14.15 36.19,13.77 34.95,13.77 R7.2
SPI_FLASH_MOSI: length 22.8
  TOP w0.254: U4.5 42.33,8.04 41.83,7.54 39.59,7.54 39.59,7.19 39.21,7.19 39.21,7.54 38.83,7.54 38.83,7.19 38.45,7.19 38.45,7.54 38.07,7.54 38.07,7.19 37.68,7.19 37.68,7.54 37.3,7.54 37.3,7.19 36.92,7.19 36.92,7.54 35.1,7.54 33.76,8.89 33.76,14.35 34.44,15.04 U1.64
TCK_F: length 21.3
  TOP w0.127: U1.109 v1(40.37,39.86)
  BOTTOM w0.127: v1(40.37,39.86) 43.59,36.64 43.59,23.31 43.97,22.92 J1.6
TDI_F: length 22
  TOP w0.127: U1.110 37.94,40.73 38.36,41.15 v1(40.46,41.15)
  BOTTOM w0.127: v1(40.46,41.15) 43.03,41.15 45.97,38.2 45.97,27.93 J1.10
TDO_F: length 28.3
  TOP w0.127: J1.8 v1(42.07,24.92) ; U1.106 v1(35,36.93)
  BOTTOM w0.127: v1(35,36.93) 34.98,36.93 ; 34.98,36.93 35,36.96 ; 34.98,36.93 34.04,35.99 34.04,25.7 34.82,24.92 v1(42.07,24.92)
TMS_F: length 33.7
  TOP w0.127: v1(36.47,37.92) 36.96,37.44 37.08,37.44 37.09,37.43 U1.107
  BOTTOM w0.127: J1.4 42.47,23.42 34.75,23.42 32.89,25.27 32.89,37.13 33.68,37.92 v1(36.47,37.92)
UART_RXD: length 12.3
  TOP w0.254: U5.8 9.98,16.66 15.27,21.95 17.7,21.95 17.71,21.93 U1.33
UART_TXD: length 13.2
  TOP w0.254: U1.32 17.96,22.43 17.96,22.43 14.93,22.43 9.48,16.98 U5.9
USB_D+: length 15.8
  TOP w0.254: J2.B6 10,6.34 11.15,5.18 11.15,3.66 10.87,3.38 8.86,3.38 8.27,3.98 v1(8.27,4.57) 8.81,4.57 9.07,4.83 9.07,6.34 9,6.41 J2.A6 9,8.58 9.05,8.64 9.05,10.45 8.98,10.53 U5.1
USB_D-: length 15.6
  TOP w0.254: v1(10.31,4.55) 10.31,4.57 9.72,4.57 9.42,4.87 9.42,6.34 9.5,6.41 J2.A7 9.5,8.58 9.41,8.66 9.41,10.45 9.48,10.53 U5.2 ; J2.B7 8.5,5.98 7.38,4.86 v1(7.38,3.75)
  BOTTOM w0.254: v1(7.38,3.75) 7.49,3.63 9.91,3.63 10.31,4.04 v1(10.31,4.55)
N00968: length 3.8
  TOP w0.254: U1.39 21.94,17.83 23.29,16.48 v1(24.46,16.48)
N10342: length 1.7
  TOP w0.254: R5.2 Y1.3
N10587: length 2.4
  TOP w0.254: R7.1 35.67,11.29 35.69,11.28 U4.2
N10673: length 2.5
  TOP w0.254: U4.6 44.12,10.01 44.13,9.99 R8.2
N14884: length 2.4
  TOP w0.254: U1.37 v1(20.94,16.09)
N15354: length 2.2
  TOP w0.254: U1.73 42.13,20.43 v1(42.42,20.73)
N15645: length 4.3
  TOP w0.254: v1(41.78,17.04) 39.37,17.04 38.44,17.97 U1.72
N29928: length 1.8
  TOP w0.254: C28.2 8.57,15.57 8.58,15.56 U5.10
N30787: length 8.8
  TOP w0.762: C1.2 v1(16.87,9.5)
  BOTTOM w1.016: v1(16.87,9.5) 16.87,15.91 U2.4 R41.1
N30939: length 10.3
  TOP w0.508: C15.2 v1(17.48,4.85)
  BOTTOM w1.016: v1(17.48,4.85) 23.83,4.85 U3.4 25.34,4.98 25.35,4.99 R42.1
N39536: length 6.2
  TOP w0.254: R21.1 35.32,60.43 33.61,58.72 U6.17
N39538: length 5.1
  TOP w0.254: R20.1 34.67,59.13 34.26,58.72 U6.16
N39540: length 3.1
  TOP w0.254: U6.15 35.4,57.61 35.41,57.61 R19.1
N39901: length 3.9
  TOP w0.254: v1(32.13,60.03) 32.13,59.51 31.66,59.04 U6.20
  BOTTOM w0.254: v1(32.13,60.03) 32.12,60.64 C36.2
N39920: length 4
  TOP w0.254: v1(30.51,60.03) 30.51,59.51 31.01,59.01 U6.21
  BOTTOM w0.254: C36.1 30.52,60.64 v1(30.51,60.03)
N40100: length 2.6
  TOP w0.254: U6.23 29.71,58.72 29.21,59.21 C38.2
N41358: length 2.7
  TOP w0.254: U6.24 29.06,55.22 v1(29.26,55.02)
N41362: length 4.4
  TOP w0.254: U6.22 30.36,54.77 v1(29.26,53.67)
N41426: length 2.6
  TOP w0.254: U6.25 28.41,58.99 27.89,59.51 R35.1
N42799: length 5.5
  TOP w0.254: U6.9 31.66,48.4 32.94,47.12 R13.2
N42805: length 5.8
  TOP w0.254: U6.10 32.31,48.79 34.24,46.86 R14.2
N42811: length 5.3
  TOP w0.254: U6.8 31.01,48.09 31.65,47.45 R12.2
N42817: length 6.1
  TOP w0.254: R15.2 35.53,46.69 32.96,49.26 U6.11
N42823: length 7.3
  TOP w0.254: U6.14 35.59,50.69 39.42,46.86 R18.2
N42829: length 6.6
  TOP w0.254: R17.2 34.26,49.55 U6.13
N42835: length 6.3
  TOP w0.254: U6.12 33.61,49.55 36.83,46.33 R16.2
N42841: length 5
  TOP w0.254: R11.2 30.35,46.21 30.36,46.21 U6.7
N43637: length 7.7
  TOP w0.254: U6.1 25.65,50.69 21.16,46.21 R22.2
N43673: length 8.2
  TOP w0.254: U6.2 27.11,49.59 27.1,49.58 27.1,48.69 26.29,47.88 24.13,47.88 22.45,46.21 R23.2
N43709: length 7.6
  TOP w0.254: R24.2 25.36,45.68 27.76,48.08 27.76,49.58 27.76,49.59 U6.3
N45080: length 7.4
  TOP w0.508: R25.1 2.58,51.04 2.57,51.03 1.57,51.03
N45186: length 1.3
  TOP w0.508: Q1.2 8.99,53.9 R25.2
N45216: length 2.1
  TOP w0.508: R26.2 Q1.1
N45901: length 3.1
  TOP w0.254: 11.73,43.41 11.33,43.41 10.92,43.81 U7.5
N45905: length 8.1
  TOP w0.254: IC1.3 9.3,48.49 5.94,45.14 U7.2
N45930: length 4.4
  TOP w0.254: R30.2 7.65,44.09 8.03,44.48 U7.6
N46162: length 6.4
  TOP w0.254: U7.1 4.23,45.8 3.58,45.15 3.58,43.1 4.83,41.86 R28.2
N46224: length 4.5
  TOP w0.254: R29.2 6.25,43.97 5.74,44.48 U7.3
N46412: length 3.3
  TOP w0.254: U7.7 10.92,45.14 IC1.4
N48976: length 3.3
  TOP w0.254: v1(11.98,4.6) 11.98,5.59 11.09,6.47 11.09,6.49 11,6.59 J2.B5
N49298: length 3.5
  TOP w0.254: J2.A5 8,6.08 v1(6.54,4.62)
N103518: length 6.7
  TOP w0.254: R40.1 17.38,43.01 17.4,42.99 17.4,42.47 18.03,41.83 20.4,41.83 21.44,40.79 U1.143
N103582: length 1.8
  TOP w0.254: R40.2 17.38,46.43 17.37,46.43 D1.2

## Copper pours and planes (outline as drawn; the poured copper is in the pictures)
+3.3V on POWER: 0.03,62.74 0.03,0.03 49.1,0.03 49.1,62.74
GND on TOP: 0.03,62.74 0.03,0.03 49.1,0.03 49.1,62.74 ; 20 cut-outs
GND on BOTTOM, GND: 0.03,62.74 0.03,0.03 49.1,0.03 49.1,62.74
